# Altium PCB Melon S3 FPGA9.PcbDoc (part 1 of 2)
Units mil, origin at the board's own origin, x right, y up, seen from the top; angles counter-clockwise.
Board outline 2597.73 x 2233.03 mil, 2 copper layers (TopLayer, BottomLayer); 117 components, 166 nets, 594 pads, 168 vias.
Unrouted connection lines stored in the file: 3.
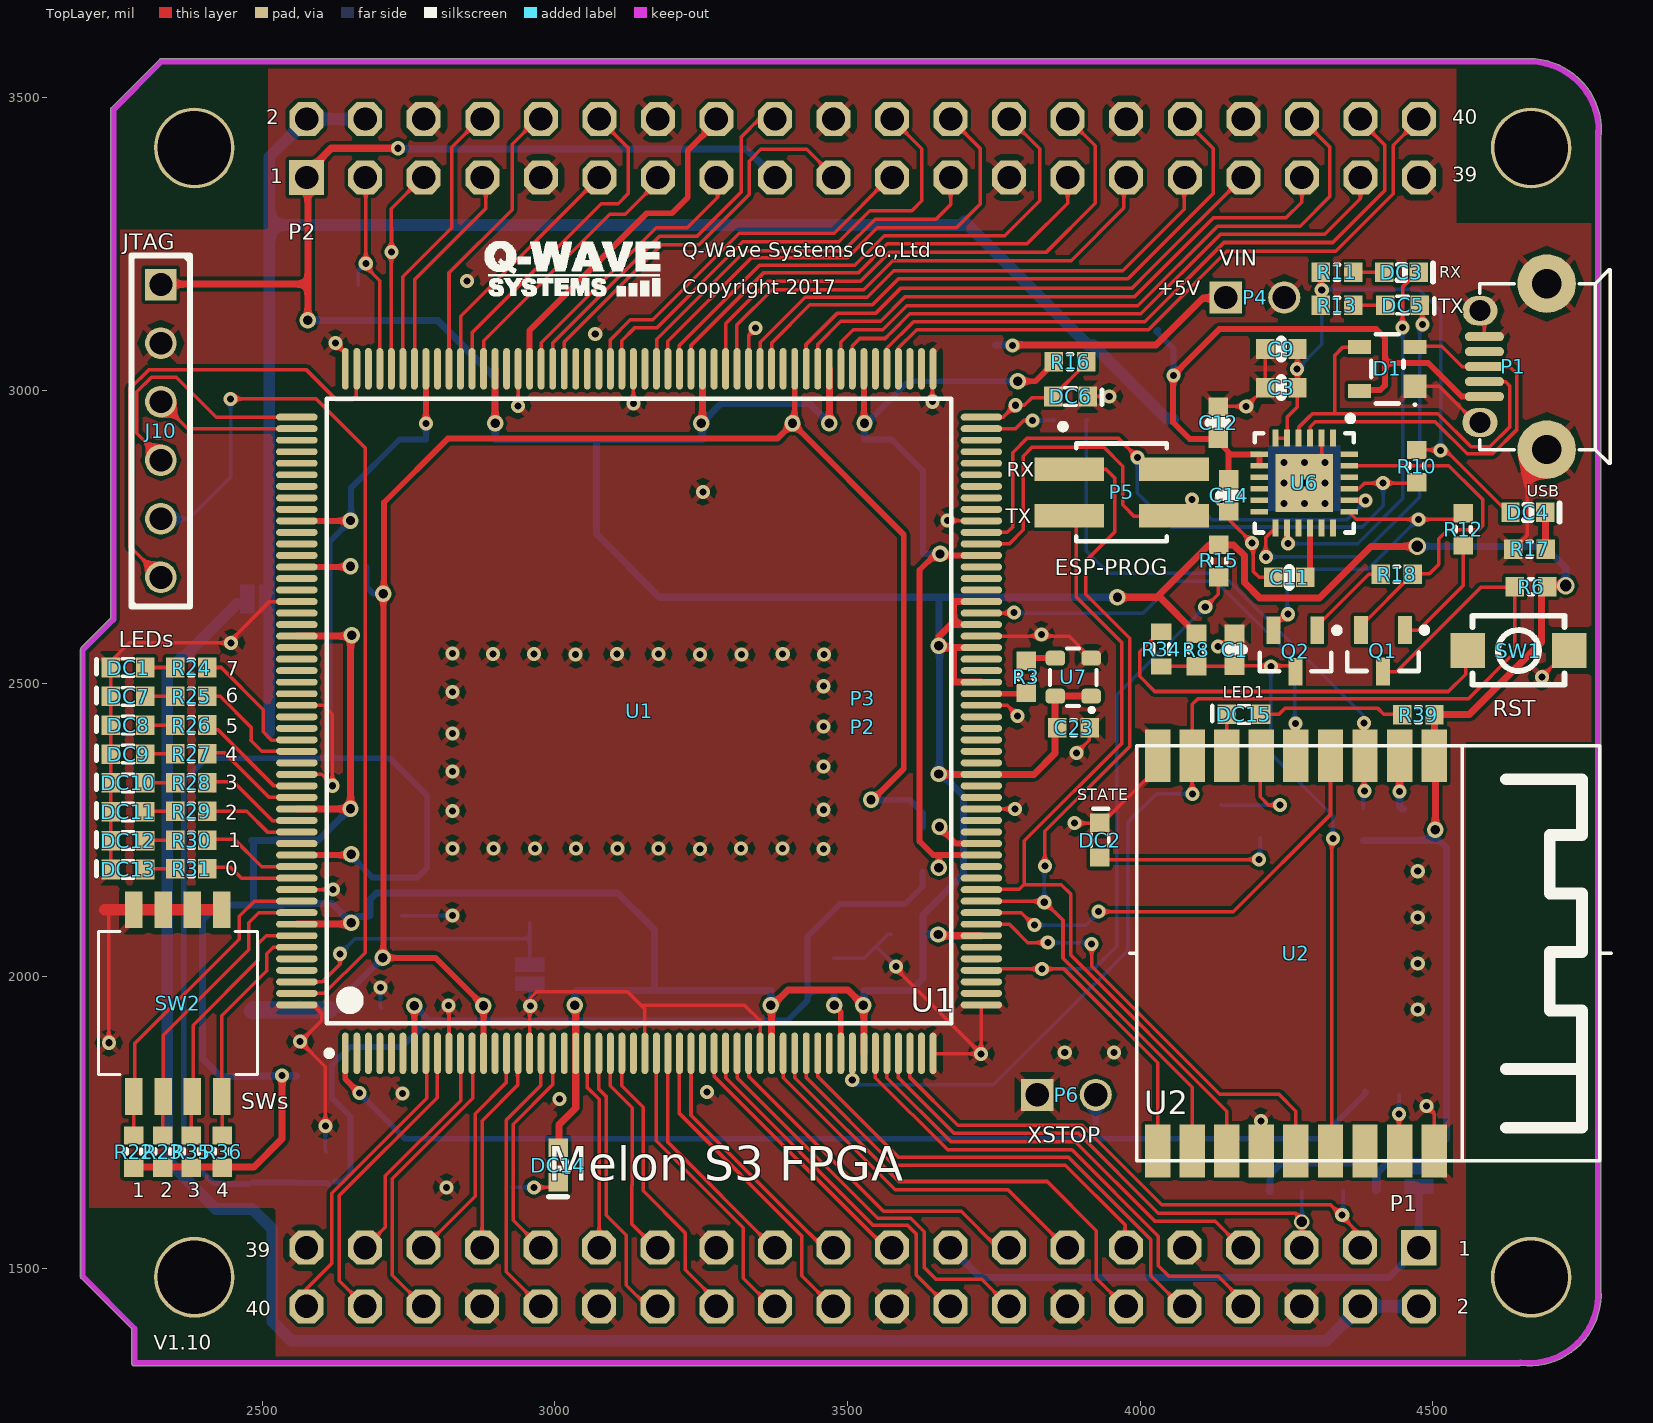
[diagram p0: TopLayer view]
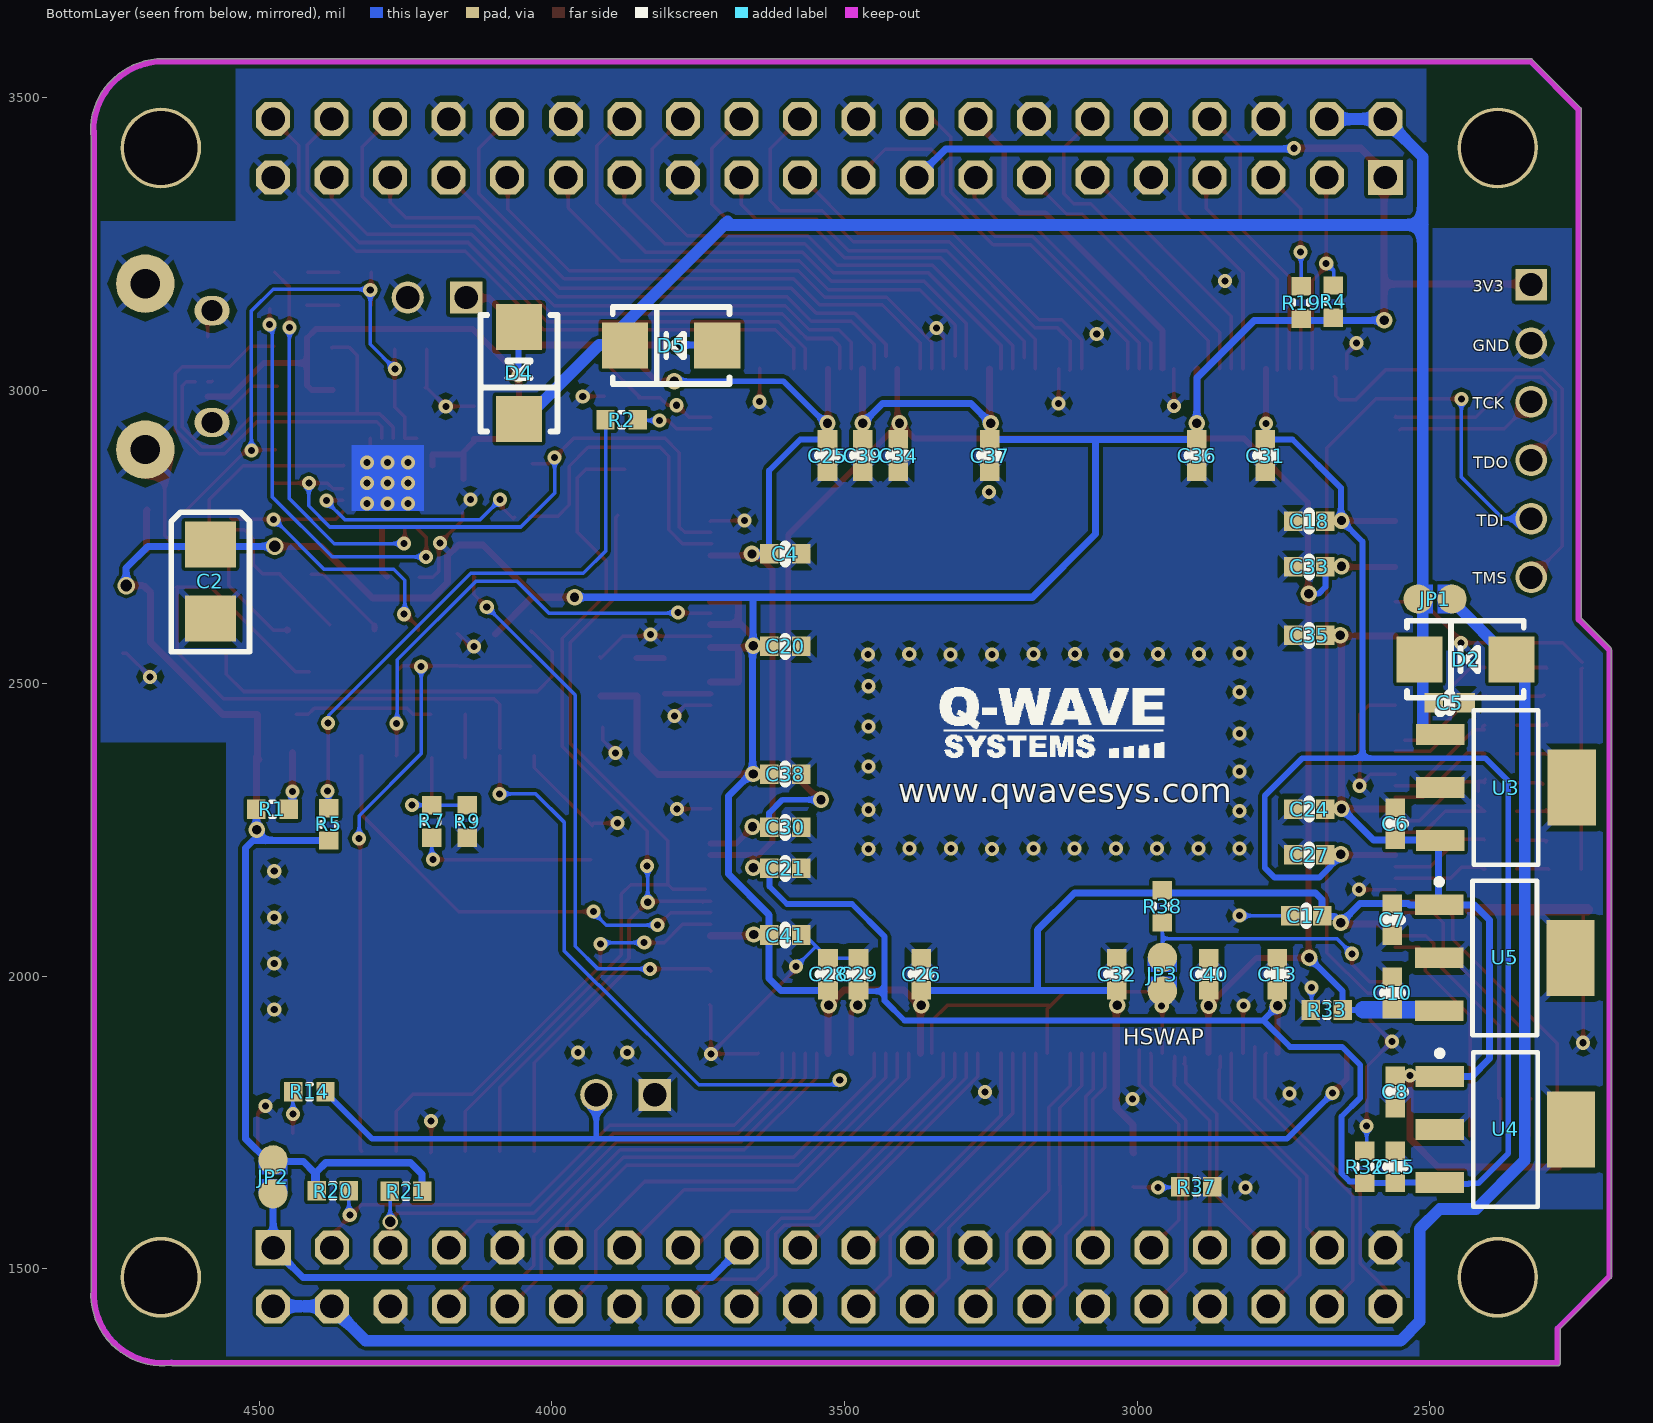
[diagram p1: BottomLayer view, seen from below]
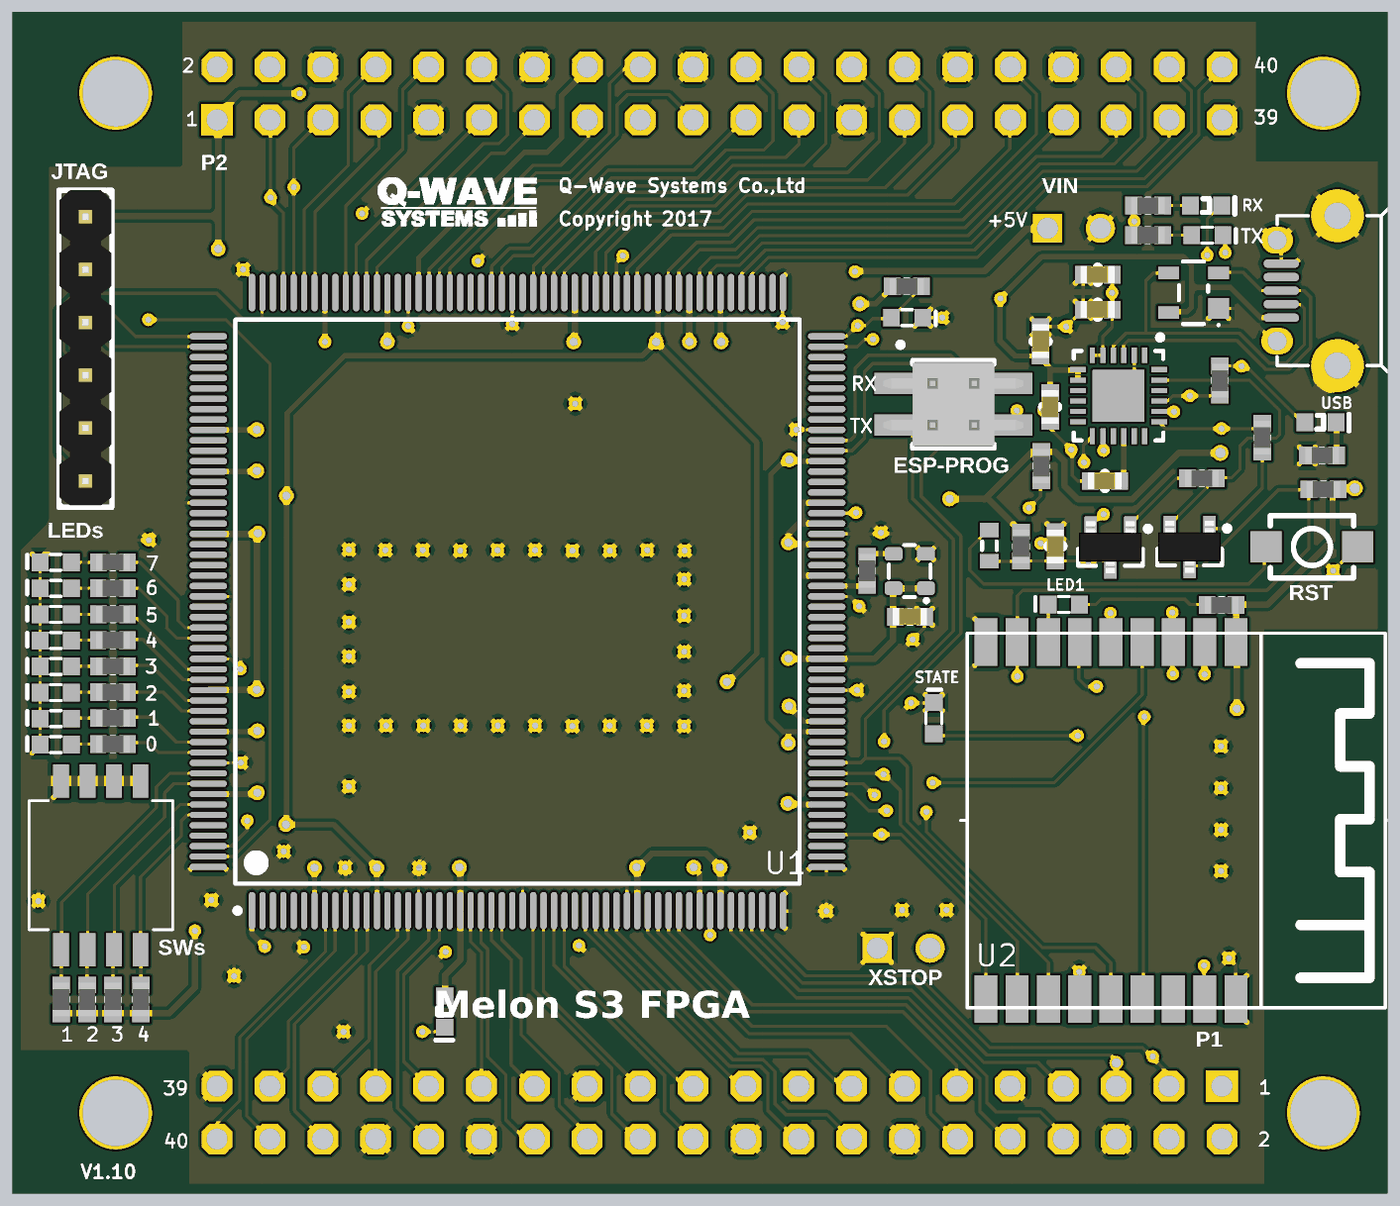
[diagram p3: 3D render of the assembled board from above, using the file's embedded part models]
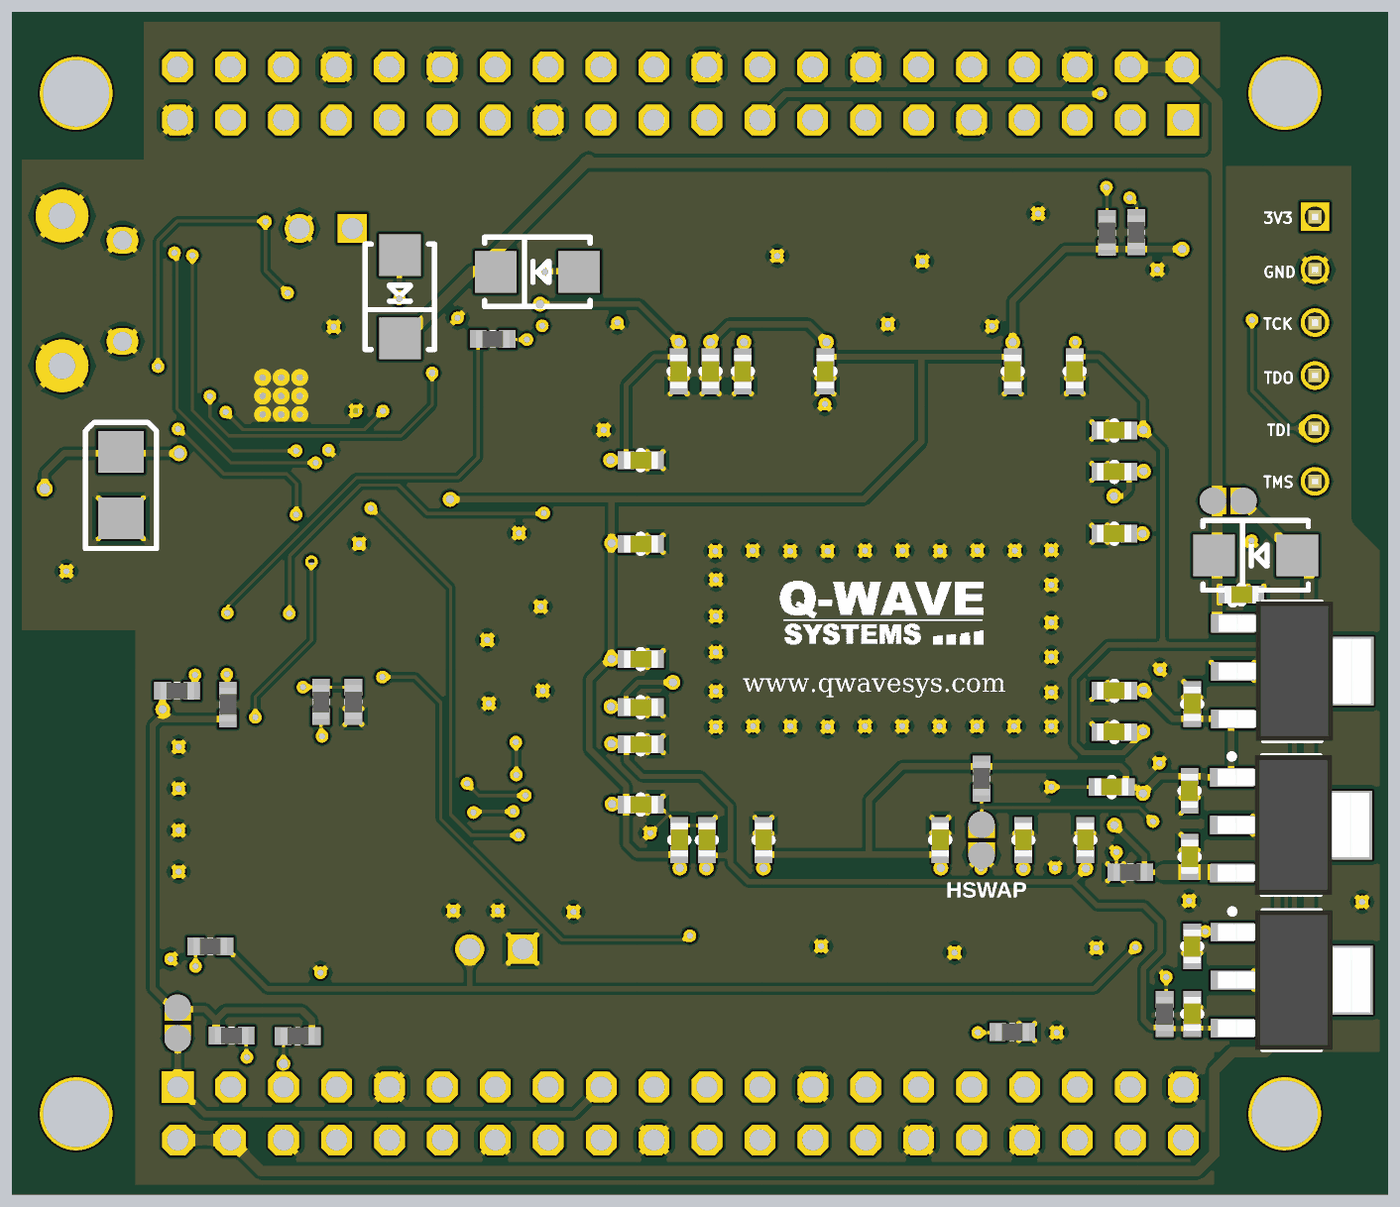
[diagram p4: 3D render of the assembled board from below, using the file's embedded part models]

## Layer stack, top to bottom
TopSolder: solder mask 0.4, Solder Resist, Dk 3.5
TopLayer: signal copper 1.4
Dielectric1: dielectric 12.6, FR-4, Dk 4.8
BottomLayer: signal copper 1.4
BottomSolder: solder mask 0.4, Solder Resist, Dk 3.5

## Board outline
4787.02,3430.73 ccw(c4664.71,3443.9) 4664.02,3566.91 ccw(c4663,3562) 4663,3567.01 2328,3567.01 ccw(c2328,3562) 2324.44,3565.53 2324.45,3565.55 2242.45,3483.55 2242.47,3483.56 ccw(c2246,3480) 2240.99,3480 2240.99,2611.08 2191.45,2561.55 2191.47,2561.56 ccw(c2195,2558) 2189.99,2558 2189.99,1487 ccw(c2195,1487) 2191.47,1483.44 2191.45,1483.45 2276.99,1397.92 2276.99,1339 ccw(c2282,1339) 2282,1333.98 4647,1333.98 ccw(c4647,1339) 4649.81,1334.84 ccw(c4664.21,1457.01) 4787.01,1464.3 ccw(c4782,1464) 4786.6,1466 ccw(c4782,1468) 4787.02,1468

## Design rules (kind name [scope] priority, off if disabled: settings)
Clearance [All] p1: gap=6 ignorepadtopadclearanceinfootprint=FALSE
ComponentClearance [All] p1: gap=0 collisioncheckmode=3 verticalgap=0 showdistances=FALSE
FabricationTestPointUsage TestPointUsage [All] p1: valid=0 allowmultiple=FALSE
FabricationTestpoint Testpoint [(IsPad And (OnTopLayer Or OnBottomLayer))] p1: side=3 testpointundercomponent=TRUE minsize=40 maxsize=100 preferedsize=60 minholesize=20 maxholesize=40 preferedholesize=32 testpointgrid=1 allowsidetop=TRUE allowsidebottom=TRUE usegrid=TRUE gridtolerance=0.01
HoleSize [All] p1: absolutevalues=TRUE maxlimit=1000 minlimit=1 maxpercent=80.000 minpercent=20.000
PolygonConnect [InNet('GND') vs InNet('GND')] p1: connectstyle=Relief reliefconductorwidth=10 reliefentries=4 polygonreliefangle="45 Angle" airgapwidth=10
RoutingVias 5V_VIA [InNet('5V')] p1: holewidth=16 width=28 viastyle="Through Hole" minholewidth=14 minwidth=24 maxholewidth=20 maxwidth=30
RoutingVias 3V3RP_VIA [InNet('5V')] p2: holewidth=16 width=28 viastyle="Through Hole" minholewidth=14 minwidth=24 maxholewidth=20 maxwidth=30
RoutingVias 5VRP_VIA [InNet('5V')] p3: holewidth=16 width=28 viastyle="Through Hole" minholewidth=14 minwidth=24 maxholewidth=20 maxwidth=30
RoutingVias 2V5_VIA [InNet('2V5')] p4: holewidth=16 width=28 viastyle="Through Hole" minholewidth=14 minwidth=24 maxholewidth=20 maxwidth=30
RoutingVias 1V2_VIA [InNet('1V2')] p5: holewidth=16 width=28 viastyle="Through Hole" minholewidth=14 minwidth=24 maxholewidth=20 maxwidth=30
RoutingVias 3V3_VIA [InNet('3V3')] p6: holewidth=16 width=28 viastyle="Through Hole" minholewidth=14 minwidth=24 maxholewidth=20 maxwidth=30
RoutingVias [All] p7: holewidth=12 width=24 viastyle="Through Hole" minholewidth=12 minwidth=24 maxholewidth=18 maxwidth=26
SilkToSolderMaskClearance SilkscreenOverComponentPads [IsPad] p1: minsilkscreentomaskgap=10 clearancetoexposedcopper=TRUE
SolderMaskExpansion [All] p1: expansion=4
UnpouredPolygon [All] p1: allowunpoured=TRUE allowshelved=TRUE
Width 5V_RP [InNet('5V_RP')] p1: maxlimit=20 minlimit=10 preferedwidth=20
Width VDDUSB [InNet('VDDUSB')] p2: maxlimit=20 minlimit=10 preferedwidth=10
Width 3V3_RP [InNet('3V3_RP')] p3: maxlimit=20 minlimit=10 preferedwidth=12
Width 2V5 [InNet('2V5')] p4: maxlimit=50 minlimit=10 preferedwidth=10
Width 1V2 [InNet('1V2')] p5: maxlimit=50 minlimit=10 preferedwidth=10
Width 3V3 [InNet('3V3')] p6: maxlimit=50 minlimit=10 preferedwidth=12
Width 5V [InNet('5V')] p7: maxlimit=50 minlimit=10 preferedwidth=20
Width [All] p8: maxlimit=500 minlimit=6 preferedwidth=6 minimp=50.000000 maximp=50.000000 favimp=50.000000
24 further rules are at their usual default settings.

## Classes and differential pairs
component class FPGA: C23 J10 JP3 R3 R38 U1 U7

## Components (designator, comment, footprint, x,y, rotation, side; value= is the part's Value field where it differs from the comment)
C1 "104" "C0603 - Marked" 4161,2557.44 r270 top
C2 "100 uF Tantalum," AVX-CAPC3528_V 4583,2674 r270 bottom
C3 "4.7uF" "C0603 - Marked" 4241,3005 r180 top
C4 "0.1uF" "C0603 - Marked" 3601,2721 r180 bottom
C5 "4.7uF" "C0603 - Marked" 2466,2467 r180 bottom locked
C6 "4.7uF" "C0603 - Marked" 2559,2260 r90 bottom
C7 "4.7uF" "C0603 - Marked" 2564,2096 r270 bottom
C8 "4.7uF" "C0603 - Marked" 2559,1802 r270 bottom
C9 "104" "C0603 - Marked" 4241,3071 r180 top
C10 "4.7uF" "C0603 - Marked" 2564,1971 r90 bottom
C11 "4.7uF" "C0603 - Marked" 4254.56,2681 r180 top
C12 "1uF" "C0603 - Marked" 4133,2945 r90 top
C13 "0.1uF" "C0603 - Marked" 2761,2003 r90 bottom
C14 "104" "C0603 - Marked" 4151,2821 r270 top
C15 "4.7uF" "C0603 - Marked" 2559,1674 r90 bottom
C17 "0.1uF" "C0603 - Marked" 2711,2103 r0 bottom
C18 "0.1uF" "C0603 - Marked" 2706,2777 r0 bottom
C20 "0.1uF" "C0603 - Marked" 3601,2563 r180 bottom
C21 "0.1uF" "C0603 - Marked" 3601,2184 r180 bottom
C23 "0.1uF" C0603 3886,2424 r180 top value="CAP CER .1UF 50V 10% X7R 0603"
C24 "0.1uF" "C0603 - Marked" 2706,2285 r0 bottom
C25 "0.1uF" "C0603 - Marked" 3529,2889 r270 bottom
C26 "0.1uF" "C0603 - Marked" 3369,2003 r90 bottom
C27 "0.1uF" "C0603 - Marked" 2706,2207 r0 bottom
C28 "0.1uF" "C0603 - Marked" 3528,2003 r90 bottom
C29 "0.1uF" "C0603 - Marked" 3476,2003 r90 bottom
C30 "0.1uF" "C0603 - Marked" 3601,2254 r180 bottom
C31 "0.1uF" "C0603 - Marked" 2781,2889 r270 bottom
C32 "0.1uF" "C0603 - Marked" 3035,2003 r90 bottom
C33 "0.1uF" "C0603 - Marked" 2706,2699 r0 bottom
C34 "0.1uF" "C0603 - Marked" 3408,2889 r270 bottom
C35 "0.1uF" "C0603 - Marked" 2706,2582 r0 bottom
C36 "0.1uF" "C0603 - Marked" 2898,2889 r270 bottom
C37 "0.1uF" "C0603 - Marked" 3252,2889 r270 bottom
C38 "0.1uF" "C0603 - Marked" 3601,2345 r180 bottom
C39 "0.1uF" "C0603 - Marked" 3469,2889 r270 bottom
C40 "0.1uF" "C0603 - Marked" 2878,2003 r90 bottom
C41 "0.1uF" "C0603 - Marked" 3601,2070 r180 bottom
D1 "SP0503BAHT" SOT143-4 4422,3037 r180 top
D2 "SK1B" EDIS_SMA 2439,2541 r270 bottom locked
D4 "SK1B" EDIS_SMA 4056,3030 r180 bottom
D5 "SK1B" EDIS_SMA 3796,3077 r270 bottom
DC1 "Value" "LED_0603 - GREEN" 2271,2526.94 r180 top
DC2 "Value" "LED_0603 - GREEN" 3931,2232 r90 top
DC3 "598-8010-107F" "LED_0603 - RED" 4446,3202 r0 top
DC4 "598-8010-107F" "LED_0603 - RED" 4662,2792 r0 top
DC5 "Value" "LED_0603 - GREEN" 4448,3146 r0 top
DC6 "Value" "LED_0603 - GREEN" 3880.53,2990 r0 top
DC7 "Value" "LED_0603 - GREEN" 2271,2477.66 r180 top
DC8 "Value" "LED_0603 - GREEN" 2271,2428.39 r180 top
DC9 "Value" "LED_0603 - GREEN" 2271,2379.11 r180 top
DC10 "Value" "LED_0603 - GREEN" 2271,2329.83 r180 top
DC11 "Value" "LED_0603 - GREEN" 2271,2280.55 r180 top
DC12 "Value" "LED_0603 - GREEN" 2271,2231.28 r180 top
DC13 "Value" "LED_0603 - GREEN" 2271,2182 r180 top
DC14 "598-8010-107F" "LED_0603 - RED" 3006,1677 r270 top
DC15 "Value" "LED_0603 - GREEN" 4177,2447 r180 top
J10 "Value" "JTAG - Digilent HS1" 2327,2931 r270 top
JP1 "Solder Jumper" SOLDER_JUMPER 2462,2644 r0 bottom
JP2 "Solder Jumper" SOLDER_JUMPER 4476,1628 r90 bottom
JP3 "Solder Jumper" SOLDER_JUMPER 2957,2032 r270 bottom
P1 "MicroUSB" MICRO-USB-CON 4580.13,3041 r90 top
P2 "MHDR2X20" "Raspberry Con" 4475.73,1535.87 r180 top locked
P3 "MHDR2X20" "Raspberry Con" 2576,3364 r0 top locked
P4 "VIN" "HEADER_2_40_100 THRU SIP" 4146,3159 r0 top
P5 "TW-02-04-L-D-330-SM" SMTC-TW-02-04-X-D-330-SM 3968,2826 r270 top locked
P6 "PROG" "HEADER_2_40_100 THRU SIP" 3824,1797 r0 top
Q1 "BC847C" SOT-23 4414.6,2555.57 r270 top
Q2 "BC847C" SOT-23 4265,2555 r270 top
R1 "12K" R0603 4477,2285 r0 bottom
R2 "68" R0603 3880.56,2950 r0 bottom
R3 "68" R0603 3805,2511 r270 top
R4 "10k" R0603 2665,3152 r270 bottom
R5 "2K2" R0603 4381,2259 r270 bottom
R6 "12K" R0603 4667.56,2665 r0 top
R7 "2K" R0603 4205,2264 r270 bottom
R8 "12K" R0603 4096,2557 r90 top
R9 "12K" R0603 4144,2264 r270 bottom
R10 "4K7 (NA)" R0603 4472,2871 r90 top
R11 "2K" R0603 4336,3202 r180 top
R12 "12K" R0603 4552,2763 r90 top
R13 "2K" R0603 4336,3146 r180 top
R14 "68" R0603 4414,1802 r0 bottom
R15 "4K7" R0603 4134,2709 r270 top
R16 "330" R0603 3880,3049 r0 top
R17 "2K" R0603 4665,2729 r0 top
R18 "12K" R0603 4438,2686 r0 top
R19 "10k" R0603 2720,3150.44 r270 bottom
R20 "10k" R0603 4374,1633 r0 bottom
R21 "10k" R0603 4249,1632 r180 bottom
R22 "4K7" R0603 2281,1700 r90 top
R23 "4K7" R0603 2330,1700 r90 top
R24 "200" R0603 2379,2527 r0 top value="RES 200 OHM 1/10W 1% 0603 SMD"
R25 "200" R0603 2379,2477.86 r0 top value="RES 200 OHM 1/10W 1% 0603 SMD"
R26 "200" R0603 2379,2428.71 r0 top value="RES 200 OHM 1/10W 1% 0603 SMD"
R27 "200" R0603 2379,2379.57 r0 top value="RES 200 OHM 1/10W 1% 0603 SMD"
R28 "200" R0603 2379,2330.43 r0 top value="RES 200 OHM 1/10W 1% 0603 SMD"
R29 "200" R0603 2379,2281.29 r0 top value="RES 200 OHM 1/10W 1% 0603 SMD"
R30 "200" R0603 2379,2232.14 r0 top value="RES 200 OHM 1/10W 1% 0603 SMD"
R31 "200" R0603 2379,2183 r0 top value="RES 200 OHM 1/10W 1% 0603 SMD"
R32 "120" R0603 2611,1674 r90 bottom
R33 "120" R0603 2676,1942 r0 bottom
R34 "470" J1-0603 4036,2558.47 r270 top value=470R
R35 "4K7" R0603 2379,1700 r90 top
R36 "4K7" R0603 2432,1700 r90 top
R37 "2K" R0603 2899,1640 r0 bottom
R38 "10K" R0603 2957,2119 r90 bottom
R39 "2K" R0603 4475,2446 r180 top
SW1 "RESET" SW_MINI 4646,2556 r180 top
SW2 "CHS-04TA" EHS104L 2220.37,1831.99 r0 top
U1 "XC3S500E-4PQG208C" PQG208_N 3143.97,2452.65 r90 top locked
U2 "ESP8266_WROOM_02" "ESP WROOM02-Fit Size" 4029.67,2376.2 r270 top locked
U3 "MCP1826S-3302E/DB" SOT223 2370,2322 r180 bottom locked
U4 "MCP1826S-2502E/DB" SOT223 2371,1738 r180 bottom locked
U5 "MCP1826S-1202E/DB" SOT223 2372,2031 r180 bottom
U6 "CP2104" "QFN24 - duplicate" 4280.21,2842.23 r270 top locked
U7 "ASDMB-50.000MHZ-LC-T" "ASDMB - osc" 3916,2478 r90 top

## Footprints (in the part's own frame and the unit in brackets; to place one, negate y for a bottom-side part, rotate by r counter-clockwise, add the part's x,y. Pads: shape width x height; smd on the part's side, far side on the other; paste and mask are expansions set on the pad)
"ASDMB - osc" [mm]
  rrect50% 0.65x0.85 smd: 1(0,0) 2(1.65,0) 3(1.65,1.55) 4(0,1.55)
  silkscreen extent -0.65,-0.23 2.08,1.78, body extent -0.43,-0.23 2.07,1.76, height 0.76
AVX-CAPC3528_V [mm] "SMT Capacitor, 2 Leads, Body 3.5x2.8mm"
  rect 2x2.2 smd: 1(-1.6,0) 2(1.6,0)
  silkscreen extent -3,-1.7 3.05,1.7, body extent -1.79,-1.54 1.8,1.54, height 1.9
C0603 [mm]
  rect 0.8x0.85 smd: 1(-0.7,0) 2(0.7,0)
  silkscreen extent -0.1,-0.33 0.1,0.33, body extent -0.8,-0.42 0.82,0.4, height 0.46
"C0603 - Marked" [mm]
  rect 0.8x0.85 smd: 1(-0.7,0) 2(0.7,0)
  silkscreen extent 0,-0.33 0,0.33, body extent -0.8,-0.42 0.82,0.4, height 0.46
EDIS_SMA [mm]
  rect 2x2 smd: 1(0,2) 2(0,-2)
  silkscreen extent -1.67,-2.53 1.67,2.52, body extent -1.4,-1.91 1.27,1.91, height 0.89
EHS104L [mm]
  rect 0.76x1.6 smd: 1(1.54,7.14) 2(1.54,-0.965) 3(2.81,7.14) 4(2.81,-0.965) 5(4.08,7.14) 6(4.08,-0.965) 7(5.35,7.14) 8(5.35,-0.965)
  silkscreen extent 0,0 6.9,6.2, body extent -0.02,-1.05 6.88,7.22, height 2.75
"ESP WROOM02-Fit Size" [mm]
  rect 2.286x1.1 smd: 1(0,12) 2(0,10.5) 3(0,9) 4(0,7.5) 5(0,6) 6(0,4.5) 7(0,3) 8(0,1.5) 9(0,0) 10(17.15,0) 11(17.15,1.5) 12(17.15,3) 13(17.15,4.5) 14(17.15,6) 15(17.15,7.5) 16(17.15,9) 17(17.15,10.5) 18(17.15,12)
  silkscreen extent -0.43,-1.21 17.57,19.69
"HEADER_2_40_100 THRU SIP" [mil]
  rect 55x55 hole 40: 1(0,0)
  round 55 hole 40: 2(100,0)
J1-0603 [mm] "Chip Resistor, Body 1.6x0.8mm, IPC High Density"
  rect 0.7x0.9 smd: 1(-0.75,0) 2(0.75,0)
  silkscreen extent -0.2,-0.35 0.2,0.35, body extent -0.85,-0.48 0.85,0.48, height 0.9
"JTAG - Digilent HS1" [mil]
  rect 54x54 hole 39: 1(-250,0)
  round 54 hole 39: 2(-150,0) 3(-50,0) 4(50,0) 5(150,0) 6(250,0)
  silkscreen extent -300,-50 300,50, body extent -300,-49 296,49, height 323
"LED_0603 - GREEN" [mm]
  rect 0.8x0.85 smd: A(-0.75,0) C(0.75,0)
  silkscreen extent -0.25,-0.38 1.37,0.38, body extent -0.8,-0.4 0.8,0.4, height 0.75
"LED_0603 - RED" [mm]
  rect 0.8x0.85 smd: A(-0.75,0) C(0.75,0)
  silkscreen extent -0.18,-0.41 1.37,0.38, body extent -0.8,-0.4 0.8,0.4, height 0.75
MICRO-USB-CON [mm]
  oval 0.4x1.7 smd: 1(1.3,-0.2) 2(0.65,-0.2) 3(0,-0.2) 4(-0.65,-0.2) 5(-1.3,-0.2)
  oval 1.27x1.524 hole 0.914: G1(2.425,0) G3(-2.425,0)
  round 2.54 hole 1.27: G2(3.6,-2.9) G4(-3.6,-2.9)
  silkscreen extent -4.2,-5.65 4.2,0
PQG208_N [mm] "Shrink QFP, 208-Leads, Body 28x28mm, Pitch 0.5mm, IPC Medium Density"
  oval 1.8x0.3 smd: 1(-14.85,12.75) 2(-14.85,12.25) 3(-14.85,11.75) 4(-14.85,11.25) 5(-14.85,10.75) 6(-14.85,10.25) 7(-14.85,9.75) 8(-14.85,9.25) 9(-14.85,8.75) 10(-14.85,8.25) 11(-14.85,7.75) 12(-14.85,7.25) 13(-14.85,6.75) 14(-14.85,6.25) 15(-14.85,5.75) 16(-14.85,5.25) 17(-14.85,4.75) 18(-14.85,4.25) 19(-14.85,3.75) 20(-14.85,3.25) 21(-14.85,2.75) 22(-14.85,2.25) 23(-14.85,1.75) 24(-14.85,1.25) 25(-14.85,0.75) 26(-14.85,0.25) 27(-14.85,-0.25) 28(-14.85,-0.75) 29(-14.85,-1.25) 30(-14.85,-1.75) 31(-14.85,-2.25) 32(-14.85,-2.75) 33(-14.85,-3.25) 34(-14.85,-3.75) 35(-14.85,-4.25) 36(-14.85,-4.75) 37(-14.85,-5.25) 38(-14.85,-5.75) 39(-14.85,-6.25) 40(-14.85,-6.75) 41(-14.85,-7.25) 42(-14.85,-7.75) 43(-14.85,-8.25) 44(-14.85,-8.75) 45(-14.85,-9.25) 46(-14.85,-9.75) 47(-14.85,-10.25) 48(-14.85,-10.75) 49(-14.85,-11.25) 50(-14.85,-11.75) 51(-14.85,-12.25) 52(-14.85,-12.75) 105(14.85,-12.75) 106(14.85,-12.25) 107(14.85,-11.75) 108(14.85,-11.25) 109(14.85,-10.75) 110(14.85,-10.25) 111(14.85,-9.75) 112(14.85,-9.25) 113(14.85,-8.75) 114(14.85,-8.25) 115(14.85,-7.75) 116(14.85,-7.25) 117(14.85,-6.75) 118(14.85,-6.25) 119(14.85,-5.75) 120(14.85,-5.25) 121(14.85,-4.75) 122(14.85,-4.25) 123(14.85,-3.75) 124(14.85,-3.25) 125(14.85,-2.75) 126(14.85,-2.25) 127(14.85,-1.75) 128(14.85,-1.25) 129(14.85,-0.75) 130(14.85,-0.25) 131(14.85,0.25) 132(14.85,0.75) 133(14.85,1.25) 134(14.85,1.75) 135(14.85,2.25) 136(14.85,2.75) 137(14.85,3.25) 138(14.85,3.75) 139(14.85,4.25) 140(14.85,4.75) 141(14.85,5.25) 142(14.85,5.75) 143(14.85,6.25) 144(14.85,6.75) 145(14.85,7.25) 146(14.85,7.75) 147(14.85,8.25) 148(14.85,8.75) 149(14.85,9.25) 150(14.85,9.75) 151(14.85,10.25) 152(14.85,10.75) 153(14.85,11.25) 154(14.85,11.75) 155(14.85,12.25) 156(14.85,12.75)
  oval 0.3x1.8 smd: 53(-12.75,-14.85) 54(-12.25,-14.85) 55(-11.75,-14.85) 56(-11.25,-14.85) 57(-10.75,-14.85) 58(-10.25,-14.85) 59(-9.75,-14.85) 60(-9.25,-14.85) 61(-8.75,-14.85) 62(-8.25,-14.85) 63(-7.75,-14.85) 64(-7.25,-14.85) 65(-6.75,-14.85) 66(-6.25,-14.85) 67(-5.75,-14.85) 68(-5.25,-14.85) 69(-4.75,-14.85) 70(-4.25,-14.85) 71(-3.75,-14.85) 72(-3.25,-14.85) 73(-2.75,-14.85) 74(-2.25,-14.85) 75(-1.75,-14.85) 76(-1.25,-14.85) 77(-0.75,-14.85) 78(-0.25,-14.85) 79(0.25,-14.85) 80(0.75,-14.85) 81(1.25,-14.85) 82(1.75,-14.85) 83(2.25,-14.85) 84(2.75,-14.85) 85(3.25,-14.85) 86(3.75,-14.85) 87(4.25,-14.85) 88(4.75,-14.85) 89(5.25,-14.85) 90(5.75,-14.85) 91(6.25,-14.85) 92(6.75,-14.85) 93(7.25,-14.85) 94(7.75,-14.85) 95(8.25,-14.85) 96(8.75,-14.85) 97(9.25,-14.85) 98(9.75,-14.85) 99(10.25,-14.85) 100(10.75,-14.85) 101(11.25,-14.85) 102(11.75,-14.85) 103(12.25,-14.85) 104(12.75,-14.85) 157(12.75,14.85) 158(12.25,14.85) 159(11.75,14.85) 160(11.25,14.85) 161(10.75,14.85) 162(10.25,14.85) 163(9.75,14.85) 164(9.25,14.85) 165(8.75,14.85) 166(8.25,14.85) 167(7.75,14.85) 168(7.25,14.85) 169(6.75,14.85) 170(6.25,14.85) 171(5.75,14.85) 172(5.25,14.85) 173(4.75,14.85) 174(4.25,14.85) 175(3.75,14.85) 176(3.25,14.85) 177(2.75,14.85) 178(2.25,14.85) 179(1.75,14.85) 180(1.25,14.85) 181(0.75,14.85) 182(0.25,14.85) 183(-0.25,14.85) 184(-0.75,14.85) 185(-1.25,14.85) 186(-1.75,14.85) 187(-2.25,14.85) 188(-2.75,14.85) 189(-3.25,14.85) 190(-3.75,14.85) 191(-4.25,14.85) 192(-4.75,14.85) 193(-5.25,14.85) 194(-5.75,14.85) 195(-6.25,14.85) 196(-6.75,14.85) 197(-7.25,14.85) 198(-7.75,14.85) 199(-8.25,14.85) 200(-8.75,14.85) 201(-9.25,14.85) 202(-9.75,14.85) 203(-10.25,14.85) 204(-10.75,14.85) 205(-11.25,14.85) 206(-11.75,14.85) 207(-12.25,14.85) 208(-12.75,14.85)
  silkscreen extent -14.97,-13.55 13.55,13.57, body extent -14,-14 14,14, height 4.1
"QFN24 - duplicate" [mm]
  rect 0.75x0.25 smd: 1(-1.95,1.25) 2(-1.95,0.75) 3(-1.95,0.25) 4(-1.95,-0.25) 5(-1.95,-0.75) 6(-1.95,-1.25) 13(1.95,-1.25) 14(1.95,-0.75) 15(1.95,-0.25) 16(1.95,0.25) 17(1.95,0.75) 18(1.95,1.25)
  rect 2.5x2.5 smd: 2(0,0)
  rect 0.25x0.75 smd: 7(-1.25,-1.95) 8(-0.75,-1.95) 9(-0.25,-1.95) 10(0.25,-1.95) 11(0.75,-1.95) 12(1.25,-1.95) 19(1.25,1.95) 20(0.75,1.95) 21(0.25,1.95) 22(-0.25,1.95) 23(-0.75,1.95) 24(-1.25,1.95)
  silkscreen extent -2.92,-2.15 2.15,2.15, body extent -2,-2 2,2, height 0.8
R0603 [mm]
  rect 0.8x0.85 smd: 1(-0.7,0) 2(0.7,0)
  silkscreen extent -0.1,-0.33 0.1,0.33, body extent -0.81,-0.41 0.81,0.41, height 0.46
"Raspberry Con" [mil]
  rect 60x60 hole 40: 1(0,0)
  oct 58.09x58.09 hole 40: 2(0,100) 3(100,0) 4(100,100) 5(200,0) 6(200,100) 7(300,0) 8(300,100) 9(400,0) 10(400,100) 11(500,0) 12(500,100) 13(600,0) 14(600,100) 15(700,0) 16(700,100) 17(800,0) 18(800,100) 19(900,0) 20(900,100) 21(1000,0) 22(1000,100) 23(1100,0) 24(1100,100) 25(1200,0) 26(1200,100) 27(1300,0) 28(1300,100) 29(1400,0) 30(1400,100) 31(1500,0) 32(1500,100) 33(1600,0) 34(1600,100) 35(1700,0) 36(1700,100) 37(1800,0) 38(1800,100) 39(1900,0) 40(1900,100)
  round 137 hole 125: MT1(-191.73,50) MT1(-191.73,-1879.13) MT1(2091.73,50) MT1(2091.73,-1879.13)
SMTC-TW-02-04-X-D-330-SM [mm] "SMT Board Stacking Terminal Strip ASM, 2x2 Pins, Vertical, 2mm Pitch, Male"
  rect 1.02x3.025 smd: 1(-1,-2.272) 2(-1,2.273) 3(1,-2.272) 4(1,2.273)
  silkscreen extent -2.98,-2.66 2.12,1.97, body extent -2,-3.37 2,3.37, height 12.37
SOLDER_JUMPER [mil]
  round 50 smd: 1(0,0) 2(58,0)
  TopLayer region: 0,25 25,25 25,-25 0,-25
  TopLayer region: 33,25 58,25 58,-25 33,-25
SOT143-4 [mm]
  rect 1x1 smd: 1(-1.2,0.75)
  rect 1x0.6 smd: 2(-1.2,-0.95) 3(1.2,-0.95) 4(1.2,0.95)
  silkscreen extent -1.25,-1.5 0.7,1.6, body extent -0.7,-1.52 0.7,1.52, height 1.2
SOT223 [mm]
  rect 2.1x0.9 smd: 1(-2.85,2.3) 2(-2.85,0) 3(-2.85,-2.3)
  rect 2.1x3.3 smd: 4(2.85,0)
  silkscreen extent -2.98,-3.35 1.4,3.42, body extent -3.54,-3.35 3.76,3.35, height 1.75
SOT-23 [mm]
  rect 1.2x0.6 smd: 1(-0.9,0.95) 2(-0.9,-0.95) 3(0.9,0)
  silkscreen extent -1.02,-1.55 0.87,1.93, body extent -1.27,-1.5 1.23,1.5, height 1.07
SW_MINI [mm]
  rect 1.5x1.5 smd: 1(-2.2,0) 2(2.2,0)
  silkscreen extent -2,-1.51 2,1.49, body extent -1.52,-1.4 1.78,1.4, height 1.14

## Part data
C1 C9 C12 C14: library part "Cap Semi", "Capacitor 0603", MFG=KEMET, Supplier1=ES
  C1 C9 C14: MFG P/N=C0603C104J5RACTU, Supplier1 Price=0.6
  C12: MFG P/N=GRM188R61H105KAALD, Supplier1 Price=1.31
C2: library part CMP-0279-00001-1, "Capacitor, Tantalum, 100uF 10% 20V MCCT-B (3528)", Capacitance=100uF, Manufacturer=AVX, Manufacturer_PN=TAJB106K020R, Rated Voltage=20V, Tolerance=10%, ComponentLink1Description="Manufacturer URL", ComponentLink1URL=http://www.avx.com/, ComponentLink2Description=Datasheet, ComponentLink2URL=http://www.avx.com/docs/Catalogs/taj.pdf, DatasheetVersion=Jun-13, Manufacturer Part Number=TAJB106K020R, Mounting Technology="Surface Mount", PackageDescription="2-Pin SMT Capacitor, 3.5 x 2.8 mm Body", PackageReference=CAPC3528, PartNumber=TAJB106K020R, Polarity=Polarized, Technology=Tantalum
C3 C11: library part Cap, "Capacitor 0603", MFG=KEMET, MFG P/N=C0603C475K8PACTU, Supplier1=ES, Supplier1 Price=1.86
C4 C13 C17 C18 C20 C21 C24 C25 C26 C27 C28 C29 C30 C31 C32 C33 C34 C35 C36 C37 C38 C39 C40 C41: library part CAP, "Capacitor"
C5 C6 C7 C8 C10 C15: library part "C0603 - GRM188R60J475KE19D", "4.7uF 6.3volts X5R 10% (MLCC) - SMD/SMT 0603", Capacitance=4.7µF, Manufacturer="Murata Electronics North America", Manufacturer Part Number=GRM188R60J475KE19D, Operating Temperature="-55°C ~ 85°C", Package / Case="0603 (1608 Metric)", Ratings=-, Supplier Part Number 1=490-3297-1-ND, Temperature Coefficient=X5R, Tolerance=±10%, Voltage - Rated=6.3V, Applications="General Purpose", Category=Capacitors, ComponentLink1Description=http://search.murata.co.jp/Ceramy/image/img/PDF/ENG/GRM188R60J475KE19.pdf, ComponentLink1URL=http://search.murata.co.jp/Ceramy/image/img/PDF/ENG/GRM188R60J475KE19.pdf, Features=-, Height - Seated (Max)=-, Lead Spacing=-, Lead Style=-, Mounting Type="Surface Mount, MLCC", Packaging="Cut Tape (CT)", Pricing 1="1=0.19, 10=0.132, 50=0.076, 100=0.0627, 250=0.05284, 500=0.04426, 1000=0.03633 (USD)", RoHS="RoHS Compliant", Size / Dimension="0.063\" L x 0.031\" W (1.60mm x 0.80mm)", Stock 1=614848, Supplier 1=Digi-Key, Thickness (Max)="0.035\" (0.90mm)"
C23: library part GRM188R71H104KA93D, "CAP CER .1UF 50V 10% X7R 0603", Capacitance=0.1µF, Manufacturer="Murata Electronics North America", Operating Temperature="-55°C ~ 125°C", Package / Case="0603 (1608 Metric)", Ratings=-, Supplier Part Number 1=490-1519-1-ND, Temperature Coefficient=X7R, Tolerance=±10%, Voltage - Rated=50V, Applications="General Purpose", Category=Capacitors, ComponentLink1Description=http://search.murata.co.jp/Ceramy/image/img/PDF/ENG/GRM188R71H104KA93.pdf, ComponentLink1URL=http://search.murata.co.jp/Ceramy/image/img/PDF/ENG/GRM188R71H104KA93.pdf, Features=-, Lead Spacing=-, Lead Style=-, Manufacturer Part Number=GRM188R71H104KA93D, Mounting Type="Surface Mount, MLCC", Packaging="Cut Tape (CT)", Pricing 1="10=0.037, 100=0.0221, 500=0.01276, 1000=0.00884 (USD)", RoHS="RoHS Compliant", Size / Dimension="0.063\" L x 0.031\" W (1.60mm x 0.80mm)", Stock 1=9370695, Supplier 1=Digi-Key, Thickness=0.80mm
D1: "TVS DIODE 5.5VWM 8.5VC SOT143", MFG=GTK, MFG P/N=SP0503BAHTG, Supplier1=Digikey, Supplier1 Price=24.28
D2 D4 D5: library part "D Schottky", "Schottky Diode", MFG=EIC, MFG P/N=SK1B, Supplier1=ES, Supplier1 Price=3.01
DC1 DC2 DC5 DC6 DC7 DC8 DC9 DC10 DC11 DC12 DC13 DC15: library part APT1608CGCK, "LED 1.6X0.8MM 570NM GRN CLR SMD", Color=Green, Current - Test=20mA, Luminous Flux @ Current - Test=-, Manufacturer="Kingbright Corp", Millicandela Rating=50mcd, Package / Case="0603 (1608 Metric)", Supplier Part Number 1=754-1116-1-ND, Voltage - Forward (Vf) Typ=2.1V, Category=Optoelectronics, ComponentLink1Description=http://www.us.kingbright.com/images/catalog/SPEC/APT1608CGCK.pdf, ComponentLink1URL=http://www.us.kingbright.com/images/catalog/SPEC/APT1608CGCK.pdf, Height=0.75mm, Lens Style/Size="Rectangle with Flat Top, 1.2mm x 0.8mm", Lens Type=Clear, Manufacturer Part Number=APT1608CGCK, Mounting Type="Surface Mount", Packaging="Cut Tape (CT)", Pricing 1="1=0.2, 10=0.153, 25=0.1224, 100=0.1105, 250=0.102, 500=0.0918 (USD)", RoHS="RoHS Compliant", Size / Dimension="1.60mm L x 0.80mm W", Stock 1=98122, Supplier 1=Digi-Key, Viewing Angle=120°, Wavelength - Dominant=570nm, Wavelength - Peak=574nm
DC3 DC4 DC14: library part "LED0603 - 598-8010-107F", "LED ALINGAP RED CLEAR 0603 SMD", Color=Red, Current - Test=20mA, Luminous Flux @ Current - Test=-, Manufacturer=Dialight, Millicandela Rating=40mcd, Package / Case="0603 (1608 Metric)", Supplier Part Number 1=350-2029-6-ND, Voltage - Forward (Vf) Typ=2.2V, Accept Replacement="YES - Water Clear", Category=Optoelectronics, ComponentLink1Description=http://media.digikey.com/pdf/Data%20Sheets/Dialight%20PDFs/598_Series_0603_Pkg.pdf, ComponentLink1URL=http://media.digikey.com/pdf/Data%20Sheets/Dialight%20PDFs/598_Series_0603_Pkg.pdf, Height=0.70mm, Lens Style/Size="Rectangle with Flat Top, 1.1mm x 0.8mm", Lens Type=Clear, Manufacturer Part Number=598-8010-107F, Mounting Type="Surface Mount", Packaging=Digi-Reel®, Pricing 1="1=0.45, 10=0.33, 25=0.264, 100=0.1749, 250=0.1452, 500=0.1056, 1000=0.0825 (USD)", RoHS="RoHS Compliant", Size / Dimension="1.60mm L x 0.80mm W", Stock 1=37578, Supplier 1=Digi-Key, Viewing Angle=140°, Wavelength - Dominant=635nm, Wavelength - Peak=-
J10: library part "JTAG - Digilent HS1", "DIGILENT - 410-205 - PROGRAMMING CABLE, JTAG HS1, USB2", Color=Black, Manufacturer=Samtec, Manufacturer Part Number=TSW-106-08-G-S-RA, Package Quantity=1, Peak Solder Temperature="260 deg C", Supplier Part Number 1=2677508S3639200N1004, Category="Connectors, Interconnects", China ROHS Cadmium (X -> above / O -> below threshold)=O, China ROHS Hex Chromium (X -> above / O -> below threshold)=O, China ROHS Lead (X -> above / O -> below threshold)=O, China ROHS Mercury (X -> above / O -> below threshold)=O, China ROHS PBB (X -> above / O -> below threshold)=O, China ROHS PBDE (X -> above / O -> below threshold)=O, ComponentLink1Description=http://components.arrow.com/partservice/dataview/altium/2677508S3639200N1004?apiKey=aa438727d59eed98c4bed826d8d949c84cb5e685b92bf87346a0226bd2658797, ComponentLink1URL=http://components.arrow.com/partservice/dataview/altium/2677508S3639200N1004?apiKey=aa438727d59eed98c4bed826d8d949c84cb5e685b92bf87346a0226bd2658797, ComponentLink2Description=http://www.samtec.com/documents/webfiles/cpdf/TSW-XXX-XX-XXX-X-XX-XXX-MKT.pdf, ComponentLink2URL=http://www.samtec.com/documents/webfiles/cpdf/TSW-XXX-XX-XXX-X-XX-XXX-MKT.pdf, Connector Type="Header, Unshrouded", Contact Finish=Gold, Contact Finish Thickness="10µin (0.25µm)", Contact Mating Length="0.230\" (5.84mm)", Contact Type="Male Pin", EU_ROHS_PROD_EXEMPTION_BY_SUPP=N/R, Fastening Type=-, Features=-, Lead Time="0 weeks", Mounting Type="Through Hole", MSL (Moisture Sensitivity Level)=N/R, MSL Level Max=N/R, MSL Level Min=N/R, Number of Positions=6, Number of Positions Loaded=All, Number of Rows=1, Packaging=Bulk, Pitch="0.100\" (2.54mm)", Pricing 1="0=0.2649 (USD)", Pricing 2="1=0.94, 10=0.841, 100=0.6926, 500=0.5475, 1000=0.46999, 5000=0.42877, 10000=0.41228 (USD)", RoHS="CHINA ROHS: Compliant / EU ROHS: Compliant", Row Spacing=-, Stock 1=0, Stock 2=0, Supplier 1=Arrow, Supplier 2=Digi-Key, Supplier Part Number 2=SAM1038-06-ND, Termination=Solder, Termination Finish=Au/Ni
JP1 JP2 JP3: "Solder/Configuration Jumper", Manufacturer=n/a, Manufacturer Part Number=n/a, ROHS Certificate=n/a, Source=n/a, Source Part Number=n/a
P1: library part ESOC004, "Micro USB 5Pins,Female B type Right Angle, SMT", MFG=GTK, MFG P/N=MRUMRB05FTKTY-30U, Supplier1=ES, Supplier1 Price=15.35
P2 P3: "Header, 20-Pin, Dual row", LatestRevisionDate=17-Jul-2002, LatestRevisionNote="Re-released for DXP Platform.", Publisher="Altium Limited"
P4 P6: library part Header2, "Header 2 pin"
P5: library part CMP-1029-00319-1, "SMT Board Stacker, Vertical, -55 to 125 degC, 2 mm Pitch, 4-Pin, Male, RoHS", Manufacturer=Samtec, Temperature Range="-55 to 125 degC", ComponentLink1Description="Manufacturer URL", ComponentLink1URL=http://www.samtec.com, ComponentLink2Description=Datasheet, ComponentLink2URL=http://d2a072wq521u33.cloudfront.net/catalog_english//TW_SM.PDF, ComponentLink3Description="Package Specification", ComponentLink3URL=http://www.samtec.com/documents/webfiles/cpdf/TW-XX-XX-XXX-X-XXX-SM-XXX-XX-MKT1.pdf, DatasheetVersion=F-214, Mounting Technology="Surface Mount", Orientation=Vertical, PackageDescription="High Temp 2mm SMT Board Stacking Terminal Strip ASM", PackageReference=TW-02-04-X-D-330-SM, PackageVersion="CL, 3/1993", PartNumber=TW-02-04-L-D-330-SM, Pitch="2 mm", RoHS=True
Q1 Q2: library part NPN, "NPN Bipolar Transistor", MFG=PHILIPS/NXP, MFG P/N=BC847C,215, Supplier1=ES, Supplier1 Price=0.53
R1 R2 R3 R5 R6 R7 R8 R9 R10 R11 R12 R13 R14 R15 R16 R17 R18 R22 R23 R32 R33 R35 R36 R37 R38 R39: library part "Res Semi", "Resistor 0603"
  R1 R2 R3 R6 R7 R8 R9 R12 R14 R15 R16 R18 R22 R23 R32 R33 R35 R36 R38 R39: MFG=ROHM, MFG P/N=MCR03ERTF1202, Supplier1=Digikey, Supplier1 Price=0.4
  R5: MFG=ROHM, MFG P/N=MCR03ERTF2201, Supplier1=Digikey, Supplier1 Price=0.4
  R10: MFG P/N=NA
  R11 R13 R17 R37: MFG=ROHM, MFG P/N=MCR03ERTF2001, Supplier1=Digikey, Supplier1 Price=0.4
R4 R19 R20 R21: library part "R0603 - CRCW060310K0FKEA", "10k Thick Film Resistors - SMD 1/10watt 10Kohms 1%", Manufacturer="Vishay Dale", Manufacturer Part Number=CRCW060310K0FKEA, Package / Case="0603 (1608 Metric)", Power (Watts)="0.1W, 1/10W", Resistance (Ohms)=10K, Supplier Part Number 1=541-10.0KHCT-ND, Temperature Coefficient=±100ppm/°C, Tolerance=±1%, Category=Resistors, ComponentLink1Description=http://www.vishay.com/doc?20035, ComponentLink1URL=http://www.vishay.com/doc?20035, Composition="Thick Film", Features=-, Height="0.020\" (0.50mm)", Number of Terminations=2, Packaging="Cut Tape (CT)", Pricing 1="10=0.081, 50=0.0436, 200=0.0251, 1000=0.01711 (USD)", RoHS="RoHS Compliant", Size / Dimension="0.061\" L x 0.033\" W (1.55mm x 0.85mm)", Stock 1=997856, Supplier 1=Digi-Key
R24 R25 R26 R27 R28 R29 R30 R31: library part ERJ-3EKF2000V, "RES 200 OHM 1/10W 1% 0603 SMD", Manufacturer="Panasonic - ECG", Package / Case="0603 (1608 Metric)", Power (Watts)="0.1W, 1/10W", Supplier Part Number 1=P200HCT-ND, Temperature Coefficient=±100ppm/°C, Tolerance=±1%, Category=Resistors, ComponentLink1Description=http://industrial.panasonic.com/www-cgi/jvcr13pz.cgi?E+PZ+3+AOA0002+ERJ3EKF2000V+7+WW, ComponentLink1URL=http://industrial.panasonic.com/www-cgi/jvcr13pz.cgi?E+PZ+3+AOA0002+ERJ3EKF2000V+7+WW, Composition="Thick Film", Features=-, Height="0.018\" (0.45mm)", Lead Style="Surface Mount (SMD - SMT)", Manufacturer Part Number=ERJ-3EKF2000V, Packaging="Cut Tape (CT)", Pricing 1="1=0.04, 50=0.015, 100=0.0114, 250=0.00844, 500=0.00624, 1000=0.00416 (USD)", Resistance (Ohms)=200, RoHS="RoHS Compliant", Size / Dimension="0.063\" L x 0.031\" W (1.60mm x 0.80mm)", Stock 1=1279595, Supplier 1=Digi-Key
R34: library part Res3, "Resistor", LatestRevisionDate=29-May-2009, LatestRevisionNote="IPC-7351 Footprint Added.", PackageDescription="Chip Resistor", PackageReference=J1-0603, Published=8-Jun-2000, Publisher="Altium Limited"
SW1: library part SW-PB, "Tact Switch", MFG=ALPS, MFG P/N=SKRKAHE010, Supplier1=Mouser, Supplier1 Price=19.06
SW2: "SWITCH DIP 4-POS SLIDE SMD 6V", Contact Rating @ Voltage="0.1A @ 6VDC", Manufacturer="Copal Electronics Inc", Supplier Part Number 1=563-1007-2-ND, Actuator Level=Flush, Actuator Type=Standard, Category=Switches, Circuit=SPST, ComponentLink1Description=http://copal-electronics.info/en/0008e/0267f.pdf, ComponentLink1URL=http://copal-electronics.info/en/0008e/0267f.pdf, Manufacturer_PN=CHS-04TA, Manufacturer Part Number=CHS-04TA, Mounting Type="Surface Mount", Number of Positions=4, Orientation="Top Actuated", Pricing 1="500=1.33876, 1000=1.1475, 5000=1.05188 (USD)", RoHS="RoHS Compliant", Stock 1=2000, Supplier 1=Digi-Key, Washable=Yes
U1: "Spartan-3E 1.2V FPGA, 158 User I/Os, 208-Pin PQFP, Standard Performance, Commercial Grade, Pb-Free", Supplier Part Number 1=122-1520-ND, Code_JEDEC=MS-029-FA-1, ComponentLink1Description="Spartan-3E Datasheet", ComponentLink1URL=http://www.xilinx.com/support/documentation/data_sheets/ds312.pdf, ComponentLink2Description="PQG208 Package Drawing", ComponentLink2URL=http://www.xilinx.com/support/documentation/package_specs/pq208.pdf, ComponentLink3Description="Spartan-3E Documents", ComponentLink3URL=http://www.xilinx.com/support/documentation/spartan-3e.htm, ComponentLink4Description="Xilinx.com Home", ComponentLink4URL=http://www.xilinx.com, DatasheetVersion="ver3.8, Aug-2009", LatestRevisionDate=30-Oct-2009, LatestRevisionNote="Updated to datasheet version 3.8 Aug-2009.", PackageDescription="208-Pin Plastic Quad Flat Pack (PQG208) - Pb-Free", PackageReference=PQG208, PackageVersion="ver1.2, Jun-2004", Published=6-Jun-2005, Publisher="Altium Limited", Supplier 1=Digi-Key
U2: library part "ESP8266 WROOM 02", "WiFi Serial Transceiver Module (ESP8266)", MFG=ESPRESSIF, MFG P/N=ESP-WROOM-02, Supplier1=stock, Supplier1 Price=95.34
U3: library part "REG - MCP1826S-3302E/DB", "LDO REG 1A 3.3V SOT223-3", Current - Limit (Min)=-, Current - Output="1A (Min)", Manufacturer="Microchip Technology", Operating Temperature="-40°C ~ 125°C", Package / Case="TO-261-4, TO-261AA", Supplier Device Package=SOT-223-3, Supplier Part Number 1=MCP1826S-3302E/DB-ND, Voltage - Dropout (Typical)="0.25V @ 1A", Voltage - Input="Up to 6V", Voltage - Output=3.3V, Category="Integrated Circuits (ICs)", ComponentLink1Description=http://ww1.microchip.com/downloads/en/DeviceDoc/22057a.pdf, ComponentLink1URL=http://ww1.microchip.com/downloads/en/DeviceDoc/22057a.pdf, Manufacturer Part Number=MCP1826S-3302E/DB, Mounting Type="Surface Mount", Number of Regulators=1, Packaging=Tube, Pricing 1="1=0.74, 10=0.68, 25=0.57, 100=0.52 (USD)", Regulator Topology="Positive Fixed", RoHS="RoHS Compliant", Stock 1=2041, Supplier 1=Digi-Key
U4: library part MCP1826S-1202E/DB, "IC LDO REG 1A 2.5V SOT223-3", Current - Limit (Min)=-, Current - Output="1A (Min)", Manufacturer="Microchip Technology", Operating Temperature="-40°C ~ 125°C", Package / Case="TO-261-4, TO-261AA", Supplier Device Package=SOT-223-3, Supplier Part Number 1=MCP1826S-2502E/DB-ND, Voltage - Dropout (Typical)="0.25V @ 1A", Voltage - Input="Up to 6V", Voltage - Output=2.5V, Category="Integrated Circuits (ICs)", ComponentLink1Description=http://ww1.microchip.com/downloads/en/DeviceDoc/22057a.pdf, ComponentLink1URL=http://ww1.microchip.com/downloads/en/DeviceDoc/22057a.pdf, Manufacturer Part Number=MCP1826S-1202E/DB, Mounting Type="Surface Mount", Number of Regulators=1, Packaging=Tube, Pricing 1="1=0.74, 10=0.68, 25=0.57, 100=0.52 (USD)", Regulator Topology="Positive Fixed", RoHS="RoHS Compliant", Stock 1=2041, Supplier 1=Digi-Key
U5: "IC LDO REG 1A 1.2V SOT223-3", Current - Limit (Min)=-, Current - Output="1A (Min)", Manufacturer="Microchip Technology", Operating Temperature="-40°C ~ 125°C", Package / Case="TO-261-4, TO-261AA", Supplier Device Package=SOT-223-3, Supplier Part Number 1=MCP1826S-1202E/DB-ND, Voltage - Dropout (Typical)="0.25V @ 1A", Voltage - Input="Up to 6V", Voltage - Output=1.2V, Category="Integrated Circuits (ICs)", ComponentLink1Description=http://ww1.microchip.com/downloads/en/DeviceDoc/22057a.pdf, ComponentLink1URL=http://ww1.microchip.com/downloads/en/DeviceDoc/22057a.pdf, Manufacturer Part Number=MCP1826S-1202E/DB, Mounting Type="Surface Mount", Number of Regulators=1, Packaging=Tube, Pricing 1="1=0.74, 10=0.68, 25=0.57, 100=0.52 (USD)", Regulator Topology="Positive Fixed", RoHS="RoHS Compliant", Stock 1=2041, Supplier 1=Digi-Key
U6: "IC SGL USB-TO-UART BRIDGE 24QFN", MFG="Silicon Labs", MFG P/N=CP2104-F03-GM, Supplier1=Digikey, Supplier1 Price=61.5
U7: "OSC MEMS 50.000 MHZ SMD", Current - Supply (Disable) (Max)=15µA, Current - Supply (Max)=16mA, Frequency=50MHz, Frequency Stability=±50ppm, Manufacturer="Abracon Corporation", Operating Temperature="-40°C ~ 85°C", Package / Case="4-SMD, No Lead (DFN, LCC)", Supplier Part Number 1=535-11738-1-ND, Voltage - Supply="1.8 V ~ 3.3 V", Category="Crystals and Oscillators", ComponentLink1Description=http://www.abracon.com/Oscillators/ASDMB.pdf, ComponentLink1URL=http://www.abracon.com/Oscillators/ASDMB.pdf, Function="Tri-State (Output Enable)", Height="0.035\" (0.90mm)", Manufacturer Part Number=ASDMB-50.000MHZ-LC-T, Mounting Type="Surface Mount", Output=CMOS, Packaging="Cut Tape (CT)", Pricing 1="1=1.69, 10=1.463, 50=1.2826, 100=1.0125, 500=0.855 (USD)", RoHS="RoHS Compliant", Size / Dimension="0.098\" L x 0.079\" W (2.50mm x 2.00mm)", Stock 1=967, Supplier 1=Digi-Key, Type="MEMS (Silicon)"

## Via types
v1: diameter 24, hole 12, TopLayer to BottomLayer, 135 vias
v2: diameter 28, hole 16, TopLayer to BottomLayer, 30 vias
v3: diameter 30, hole 20, TopLayer to BottomLayer, 2 vias
v4: diameter 26, hole 18, TopLayer to BottomLayer, 1 vias

## Nets (pads, with @x,y where several pads share a name; then routed paths per layer and width w, separated by ;. In a path a pad name is that pad's centre, name@x,y a point inside that pad or via, vN(x,y) a via of type N, cw(c..) or ccw(c..) an arc to the next point about the centre after c; other vN are vias at no path point)
1V2: C10.1 C30.1 C33.1 C34.1 C40.1 R33.1 U1.13 U1.67 U1.117 U1.170 U5.3 | length 3315
  TopLayer w10: U1.170@2559.32,2698.71 2650.29,2698.71 v2@2651,2698 ; v2(2706,2031) v2@2707,2031 ; v2(2707,2653) v2@2707,2031 ; v2@2708,2654 2708,2809 2817,2918 3380,2918 v2(3406,2944) 3596,2754 3596,2354 v2@3543,2301 ; v2@2878,1948 2878.22,1947.78 U1.13@2878.22,1868 ; v2(2878,1949) 2796,2031 v2@2707,2031 ; v2@3406,2946 3409.72,2949.72 U1.117@3409.72,3037.29 ; v2@3656,2255 3684.73,2226.27 U1.67@3728.61,2226.27
  BottomLayer w10: 2599,1944 2620,1944 ; 2613.44,1942 2647,1942 R33.1@2648,1941 ; R33.1@2649,1946 2649,1974 v2(2706,2031) v2@2706,2030 ; C33.1@2678.44,2699 2678.44,2664.56 2690,2653 v2(2707,2653) ; v2(3540,2301) 3606,2301 3628.56,2278.44 C30.1@3628.56,2254
  BottomLayer w30: U5.3@2484.2,1940.45 2485.76,1942 C10.1@2562,1942 ; C10.1@2563,1943 2564,1942 2613.44,1942
  other v2: 3657,2255 2651,2700
2V5: C4.1 C13.1 C15.1 C18.1 C21.1 C25.1 C27.1 C29.1 C31.1 R16.1 R32.1 U1.7 U1.44 U1.66 U1.92 U1.111 U1.149 U1.166 U1.195 U4.3 | length 5795.6
  TopLayer w10: U1.195@2559.32,2206.58 2651.42,2206.58 v2@2652,2206 ; U1.166@2559.32,2777.45 2648.55,2777.45 v2@2652,2774 ; v2@2759,1949 2760.11,1947.89 U1.7@2760.11,1868 ; U1.149@2779.8,3037.29 2779.8,2944.2 v1(2780,2944) v1@2781,2943 ; v2(3477,1950) 3488.46,1938.54 U1.44@3488.46,1868 ; U1.111@3527.83,3037.29 3527.83,2947.17 v2@3530,2945 ; v2@3648,2718.39 3623,2693.39 3623,2230 3646.42,2206.58 3677.58,2206.58 U1.66@3728.61,2206.58 ; 3655,2206 3656,2205 v2(3656,2185) ; v2@3656,2717 3657.39,2718.39 U1.92@3728.61,2718.39 ; v2(3791,3016) 3821,3016 R16.1@3851.5,3046.5
  BottomLayer w10: U4.3@2476,1645 2434,1645 2433,1646 2417,1646 2366,1697 2366,2333 2405,2372 2718,2372 2782,2308 2782,2185 2765,2168 2689,2168 v2@2651,2206 ; U4.3@2483.2,1647.45 2558,1647.45 2558,1646.44 C15.1@2559,1646.44 R32.1@2611,1646.44 R32.1@2613.72,1643.72 ; 2615,2372 2615,2742 v2(2651,2778) ; R32.1@2624,1649 2637,1649 2651,1663 2651,1760 2619,1792 2619,1848 2650,1879 2739,1879 2784.5,1924.5 v2(2760,1949) v2@2759,1950 ; v2@2652,2778 2652,2834 2734.56,2916.56 C31.1@2780,2916.56 ; C31.1@2780,2916 C31.1@2780,2916.56 ; v1(2780,2944) C31.1@2780,2916.56 ; 2785,1924 3397.56,1924 3431.28,1957.72 3431.28,1974 ; C29.1@3469,1974 3431.28,1974 ; C29.1@3476,1975.44 3477,1975.44 v2(3477,1950) ; v2@3528,2940 v2@3529,2941 ; C21.1@3628,2178 3628,2153 3598,2123 3487,2123 3431.28,2067.28 3431.28,1974 ; v2(3658,2721) C4.1@3628.56,2721 3628.56,2863.44 3575.44,2916.56 C25.1@3529,2916.56 v2@3529,2941 ; v2(3791,3016) 3604,3016 v2@3529,2941
  other v2: 2652,2208 3529,2944
3V3: C2.1 C6.1 C7.1 C8.1 C17.1 C20.1 C23.2 C24.1 C26.1 C28.1 C32.1 C35.1 C36.1 C37.1 C38.1 C39.1 C41.1 DC14.A J10.1 JP2.2 P3.1 P3.17 R1.2 R4.2 R5.2 R6.2 R8.2 R15.1 R19.2 R20.2 R21.2 R22.1 R23.1 R35.1 R36.1 R38.2 R39.1 U1.21 U1.38 U1.46 U1.59 U1.73 U1.81 U1.84 U1.86 U1.88 U1.114 U1.125 U1.143 U1.176 U1.191 U1.201 U2.1 U3.3 U4.1 U5.1 U7.1 U7.4 | length 11936.1
  TopLayer w12: R22.1@2280,1674 2486,1674 2534,1722 v1(2534,1830) ; J10.1@2328,3182 2578,3182 v2(2578,3120) 2578,3365 P3.1@2576,3367 ; U1.201@2559.32,2088.47 2654.47,2088.47 v2@2655,2089 ; U1.191@2559.32,2285.32 2652.32,2285.32 v2@2653,2286 ; U1.176@2559.32,2580.6 2652.6,2580.6 v2@2654,2582 ; P3.1@2576,3364 P3.1@2577,3363 ; P3.1@2578,3374 2618,3414 v1(2732,3414) ; v2@2650.5,2579.5 2651,2579 v2(2651,2286) ; U1.143@2897.91,3037.29 2897.91,2945.09 v2@2898,2945 ; DC14.A@3006,1698 3006,1698.06 3007,1699.06 3007,1746 3035.7,1774.7 U1.21@3035.7,1868 3035.7,1948.3 v2(3034,1950) ; v2@3251,2945 3252.24,2946.24 U1.125@3252.24,3037.29 ; v2@3370,1950 3370.35,1949.65 U1.38@3370.35,1868 ; v2@3370.35,1948.35 3398,1976 3501,1976 v2(3527,1950) 3527.83,1949.17 U1.46@3527.83,1868 ; v2@3468,2944 3468.77,2944.77 U1.114@3468.77,3037.29 ; v2@3655,2072 3658.21,2068.79 U1.59@3728.61,2068.79 ; v2@3655,2563 3657.09,2560.91 U1.84@3728.61,2560.91 3682,2560.91 3681,2559.91 3681,2502.86 3682,2501.86 U1.81@3728.61,2501.86 ; v2@3656,2344 3656.38,2344.38 U1.73@3728.61,2344.38 3818.38,2344.38 3854,2380 U7.4@3854,2478 ; 3656,2579.91 3676.37,2600.28 3681,2600.28 ; U1.86@3728.61,2600.28 3681,2600.28 ; U1.88@3728.61,2639.65 3682,2639.65 3681,2638.65 3681,2600.28 ; U7.4@3854.98,2478 U7.1@3916,2478 ; v2(3961,2647) 4026,2647 4027,2646 4030,2649 ; R8.2@4096,2584.56 4031.56,2649 4030,2649 ; v3(4473,2734) 4394,2734 4306,2646 4204,2646 4178,2672 4178,2718 4159.44,2736.56 R15.1@4134,2736.56 4117.56,2736.56 4030,2649 ; U2.1@4500,2370 U2.1@4504,2374 ; v2(4504,2250) U2.1@4504,2374 ; R6.2@4695.12,2665 4685,2654.88 4685,2570 4562,2447 4503,2447 4503,2375 U2.1@4504,2374 ; R6.2@4700,2667 v3(4727,2667)
  BottomLayer w12: U3.3@2482.2,2231.45 U3.3@2485,2231.45 ; U4.1@2483.2,1828.55 2428.45,1828.55 2398,1859 2398,2096 2423.55,2121.55 U5.1@2484.2,2121.55 U5.1@2485,2121.55 ; U4.1@2484,1829.56 C8.1@2559,1829.56 ; P3.1@2576,3362 P3.1@2576,3364 ; v2(2578,3120) 2800,3120 2898,3022 v2(2898,2944) C36.1@2898,2916.56 C37.1@3252,2916.56 3252,2942 v2(3250,2944) 3284,2978 3435,2978 v2(3469,2944) ; v2(2651,2286) 2652,2285 2649,2285 2596.44,2232.44 C6.1@2559,2232.44 2521.99,2232.44 2521,2231.45 U3.3@2485,2231.45 ; v2(2652,2091) 2619.44,2123.56 C7.1@2564,2123.56 2537.01,2123.56 2535,2121.55 U5.1@2485,2121.55 ; v2@2652.5,2091.5 2663,2102 C17.1@2680,2102 ; C17.1@2684,2103 2684,2131 2695,2142 3107,2142 3170,2079 3170,1976 ; v1@2731,3413 3327,3413 P3.17@3376,3364 ; v2(3034,1950) 3035,1951 C32.1@3035,1975.44 C26.1@3369,1975.44 v2(3369,1950) ; 3071,2914 3071,2755 3179,2647 v2(3961,2647) ; v2(3527,1950) 3528,1951 C28.1@3528,1975.44 3608.44,1975.44 3628.56,1995.56 C41.1@3628.56,2070 C41.1@3628.56,2071 ; v2(3655,2071) C41.1@3628.56,2071 ; v2@3656,2572 3656,2645 ; v2@3657,2563 3657,2352.21 3649.79,2345 v2(3656,2345) 3660.5,2345 3698,2307.5 3698,2174 3628.56,2104.56 C41.1@3628.56,2071 ; R21.2@4221.44,1632 4220,1635 R21.2@4222,1637 ; R21.2@4222,1635 4222,1662 4241,1681 4386,1681 4401.56,1665.44 R20.2@4401.56,1633 ; R5.2@4381,2231.44 4489,2231.44 ; R20.2@4405,1635 4405,1664 4424,1683 4484,1683 4523,1722 4523,2218.94 4510.5,2231.44 4489,2231.44 ; v3(4473,2734) 4690,2734 4727,2697 v3(4727,2667) ; R1.2@4504.56,2285 4504.56,2251.45 4504,2250.89 v2(4504,2250) 4503.56,2250 4502.56,2249 4504.56,2247 4489,2231.44 ; U5.1@2485,2121.55 U3.3@2485,2231.45
  other v2: 3656,2564 2653,2582
3V3_RP: JP2.1 P2.1 P2.17 | length 942
  BottomLayer w12: P2.17@3675.73,1535.87 3726.6,1485 4424.86,1485 P2.1@4475.73,1535.87 4475.73,1633.27 JP2.1@4474,1635
5V: C5.1 D2.2 D4.2 D5.2 JP1.2 P3.2 P3.4 U3.1 | length 2860.5
  BottomLayer w20: U3.1@2512,2416 2512,3283 ; P3.2@2576,3462 P3.2@2576,3464 2574,3464 2575.5,3462.5 2512,3399 2512,3283 ; P3.2@2584.5,3463.5 2585,3464 P3.4@2676,3464 ; 3699.48,3289 3704.24,3284.24 ; 3705,3285 3704.24,3284.24 ; D4.2@4048,2952 4055.26,2952 D4.2@4056,2951.26 ; D4.2@4048,2953 4044,2953 3919,3078 3910.48,3078 3704.24,3284.24 ; 2512,3283 3703,3283 3704.24,3284.24
5V_RP: D2.1 JP1.1 P2.2 P2.4 | length 3382.2
  BottomLayer w20: D2.1@2360.26,2541 2338,2518.74 2338,1685 2421,1602 2483,1602 2517,1568 2517,1410 2550,1377 4318,1377 P2.4@4376.87,1435.87 ; D2.1@2362,2544 2365,2544 JP1.1@2457,2636 ; P2.4@4378,1437 P2.4@4376.87,1435.87 ; P2.2@4475.73,1435.87 P2.4@4376.87,1435.87
ADC: U2.16
CCLK: R2.1 U1.103 | length 131.9
  TopLayer w6: U1.103@3728.61,2934.93 3786.93,2934.93 3801,2949 v1(3816,2949)
  BottomLayer w6: v1(3816,2949) 3849,2949 3851,2951 R2.1@3853,2949
CP_GPIO0: DC3.C U6.14 | length 669.8
  TopLayer w6: U6.14@4250.69,2765.46 v1@4250.69,2735.69 ; v1(4252,2738.69) 4252,2737 v1@4250.69,2735.69 ; v1(4448,3108) 4448,3177 DC3.C@4473,3202 ; v1@4250.69,2735.69 4250.69,2734.31 4250,2735 v1@4250.69,2735.69
  BottomLayer w6: v1(4252,2738.69) 4371.69,2738.69 4448,2815 v1(4448,3108) 4448,3112 v1@4451,3115
CP_GPIO1: DC5.C U6.13 | length 680.1
  TopLayer w6: v1@4214,2716 4214,2748.46 U6.13@4231,2765.46 ; v1(4482,3113) DC5.C@4482,3140
  BottomLayer w6: v1(4215,2716) 4375.27,2716 4376,2716.73 ; 4376,2717 4477,2818 4477,3106 v1@4476,3107 ; v1@4482,3110 v1(4482,3113)
DIN: U1.87 U2.5 | length 779.3
  TopLayer w6: U1.87@3728.61,2619.97 3782.97,2619.97 v1(3784,2621) ; v1(4265,2431) 4265,2377.09 U2.5@4265.89,2376.2
  BottomLayer w6: v1(3784,2621) 3785,2620 4005,2620 4059,2674 4130,2674 4264,2540 v1@4264,2430
DONE: DC6.A R16.2 U1.104 | length 219.1
  TopLayer w6: U1.104@3728.61,2954.61 3765.61,2954.61 3786,2975 v1(3787,2975) 3802,2975 3815,2988 DC6.A@3851,2988 ; DC6.A@3850,2990 DC6.A@3850.5,2990.5 ; DC6.A@3851,2990 3907,3046 R16.2@3907,3049